# EAGLE board ADSR 7555 PANEL v1 (EAGLE 7.7.0)
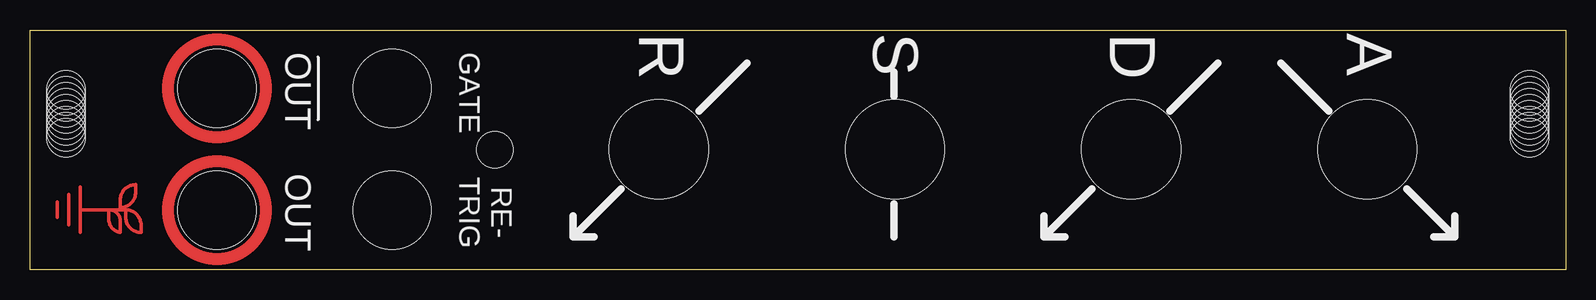
[diagram p0: board, top side]
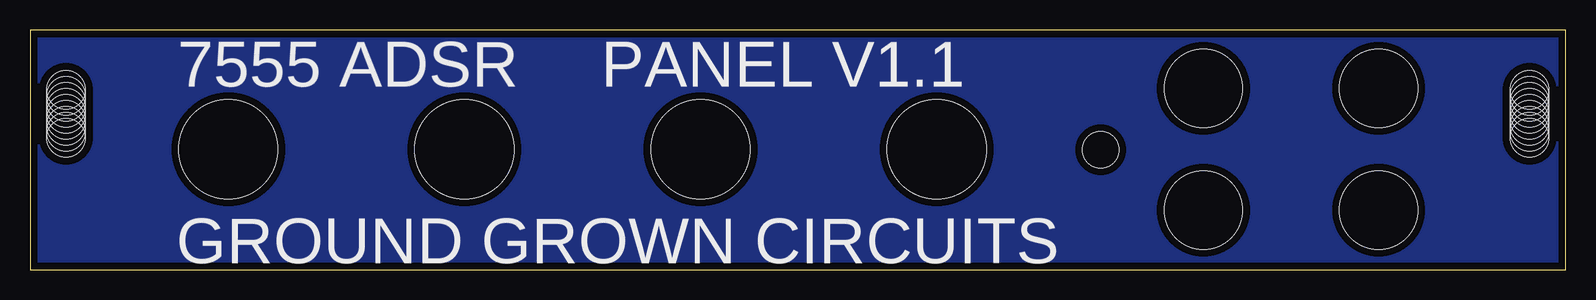
[diagram p1: board, bottom side, seen from below]

Size 128 x 20 mm. Coordinates in mm from the lower left corner, seen from the top.
Outline: 0,0 0,20 128,20 128,0 0,0
Copper layers (1*16): Top 0.035mm / dielectric 1.5mm / Bottom 0.035mm
Design rules "SparkFun": minimum track width 8mil, minimum drill 20mil, track to track 8mil, track to pad 8mil, pad to pad 8mil, via to via 8mil, smd to smd 8mil, copper to edge 8mil, drill to drill 8mil, minimum pad ring 12mil, minimum via ring 10mil, stop-mask expansion 4mil, vias tented up to drill 20mil, thermal gap 10mil

## Footprints (pad centres in the part's own frame; a part is rotated, then mirrored left to right if it is on the bottom)
POT_DRILL = hole 8.25: 0,0
MOUNT_DRILL = hole 3.2: 3,9; 3,8.5; 3,8; 3,7.5; 3,7; 3,6.5; 3,6; 3,5.5; 3,5
LED_3MM_DRILL = hole 3: 0,0
JACK_DRILL = hole 6.5: 0,0
JACK_DRILL_COPPER_EXS = hole 6.5: 0,0

## Placement (x,y rotation side)
ATT  A1M  [POT_DRILL]  111.47,10.04 180 top
DEC  A1M  [POT_DRILL]  91.78,10.04 180 top
E$1  [MOUNT_DRILL]  128,20 180 top
E$2  [MOUNT_DRILL]  0,20 180 bottom
E$3  [LOGO_SMALL_COPPER]  4.25,5 270 top
E$4  [LED_3MM_DRILL]  38.75,10 0 top
GATE  [JACK_DRILL]  30.19,15.12 90 top
INV.OUT  [JACK_DRILL_COPPER_EXS]  15.59,15.12 90 top
OUT  [JACK_DRILL_COPPER_EXS]  15.59,4.96 90 top
REL  A1M  [POT_DRILL]  52.41,10.04 180 top
SUS  B10K  [POT_DRILL]  72.1,10.04 180 top
TRIG  [JACK_DRILL]  30.19,4.96 90 top

## Library data of the parts
ATT DEC REL SUS = GroundGrownCircuits; PROD_ID: RES-09177
E$1-E$4 GATE INV.OUT OUT TRIG = GroundGrownCircuits

## Tracks (layer width: path | path; a pad name or v marks a point on that pad's centre or on a via)
S$1
  pour Bottom (isolate 0.61): 0,0 128,0 128,20 0,20

## Text on the board
tPlace: R | S | D | A | OUT | GATE | OUT | RE- / TRIG
bPlace: PANEL V1.1 | 7555 ADSR | GROUND GROWN CIRCUITS